# Altium PCB ATRACK_PILOT_V1.PcbDoc
Units mil, origin at the board's own origin, x right, y up, seen from the top; angles counter-clockwise.
Board outline 1732.28 x 1732.28 mil, 2 copper layers (Top Layer, Bottom Layer); 30 components, 25 nets, 112 pads, 31 vias.
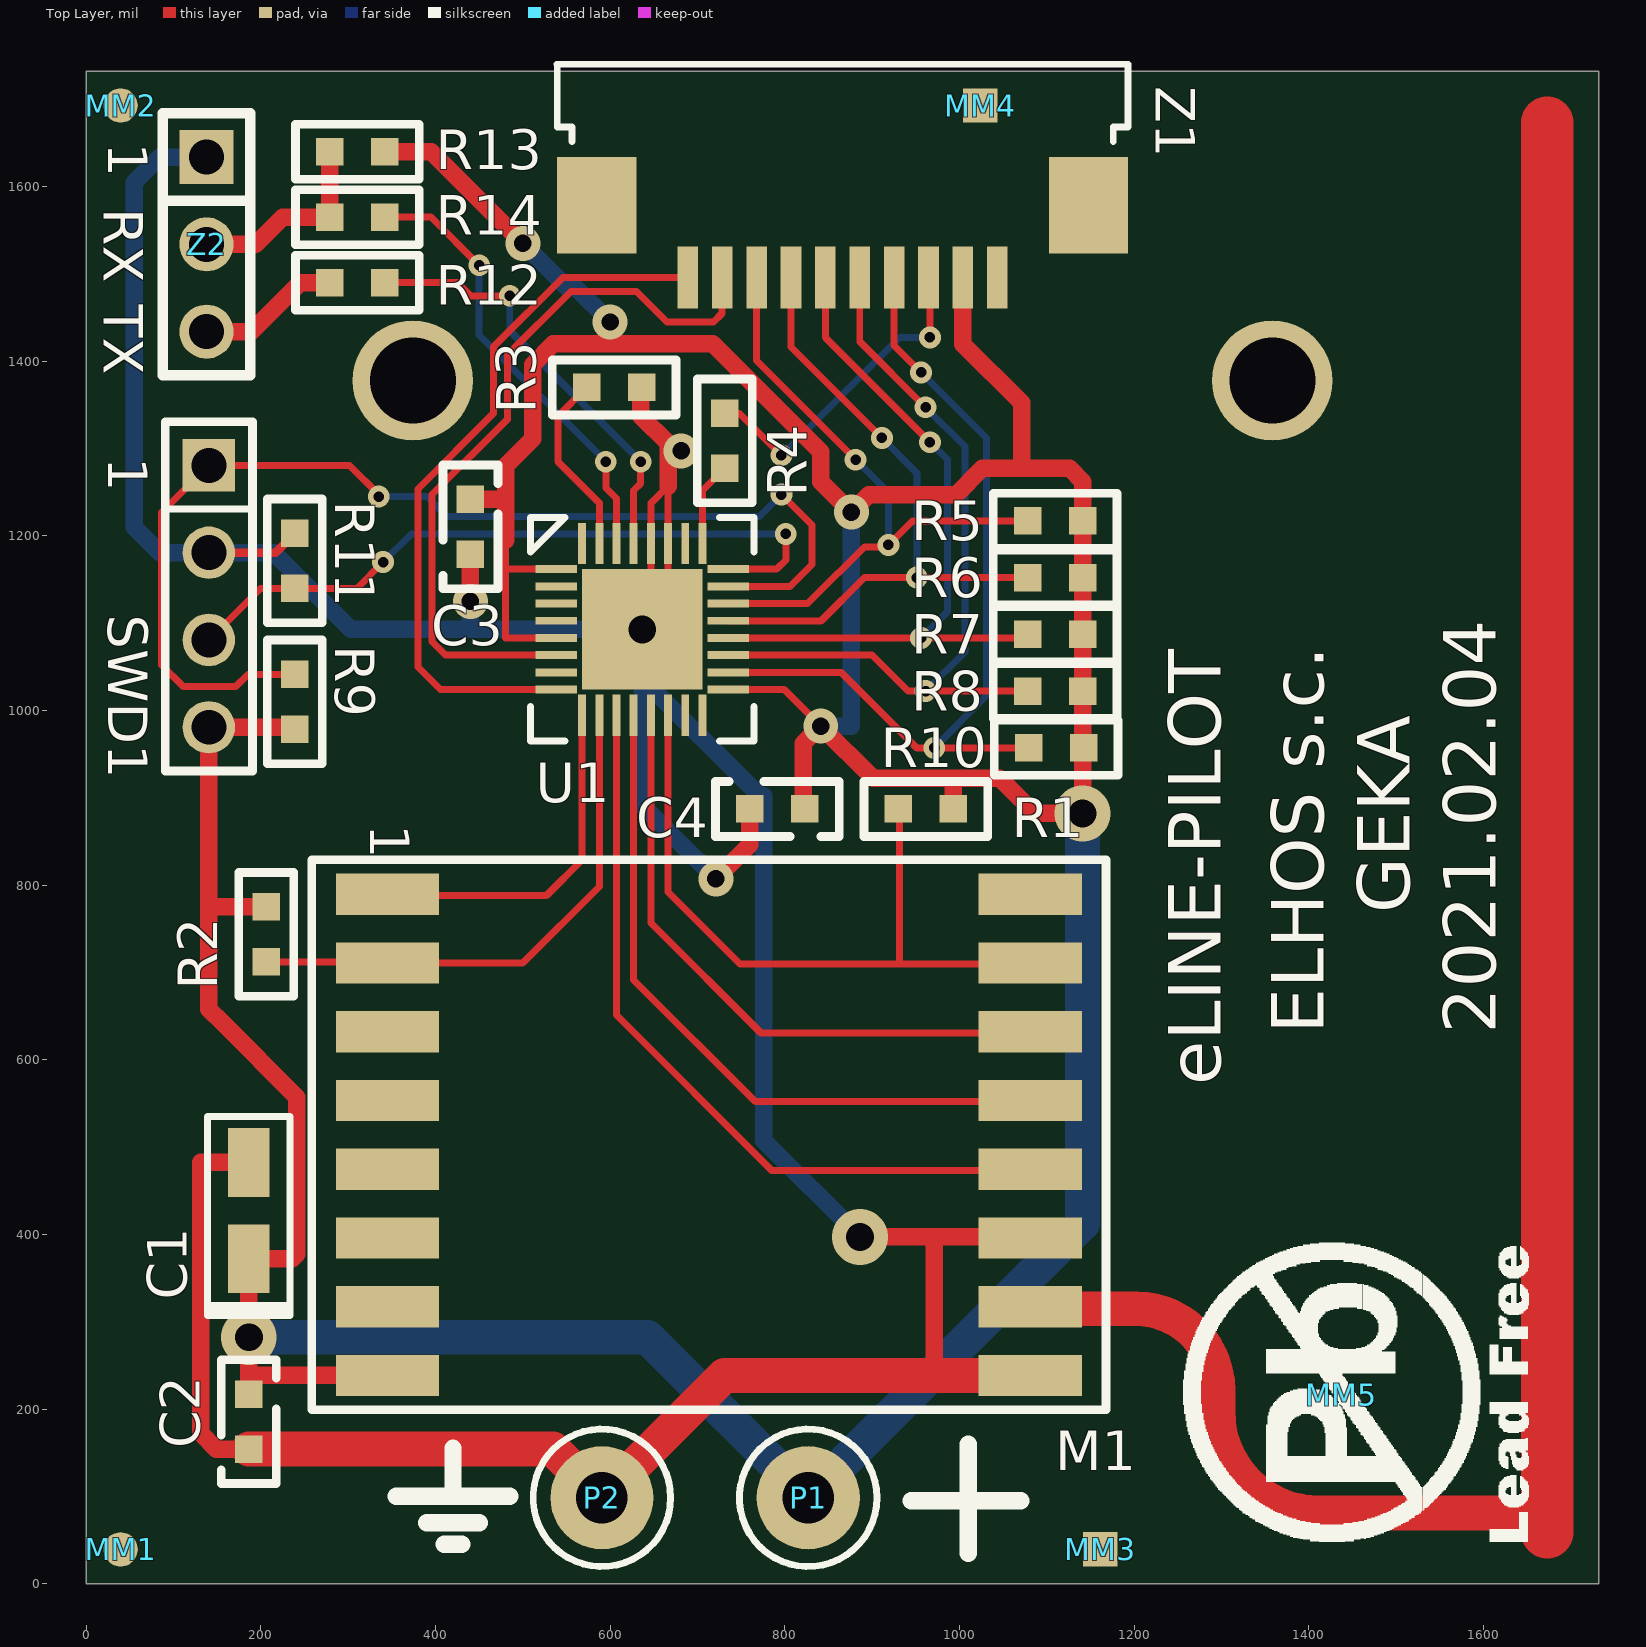
[diagram p0: Top Layer view]
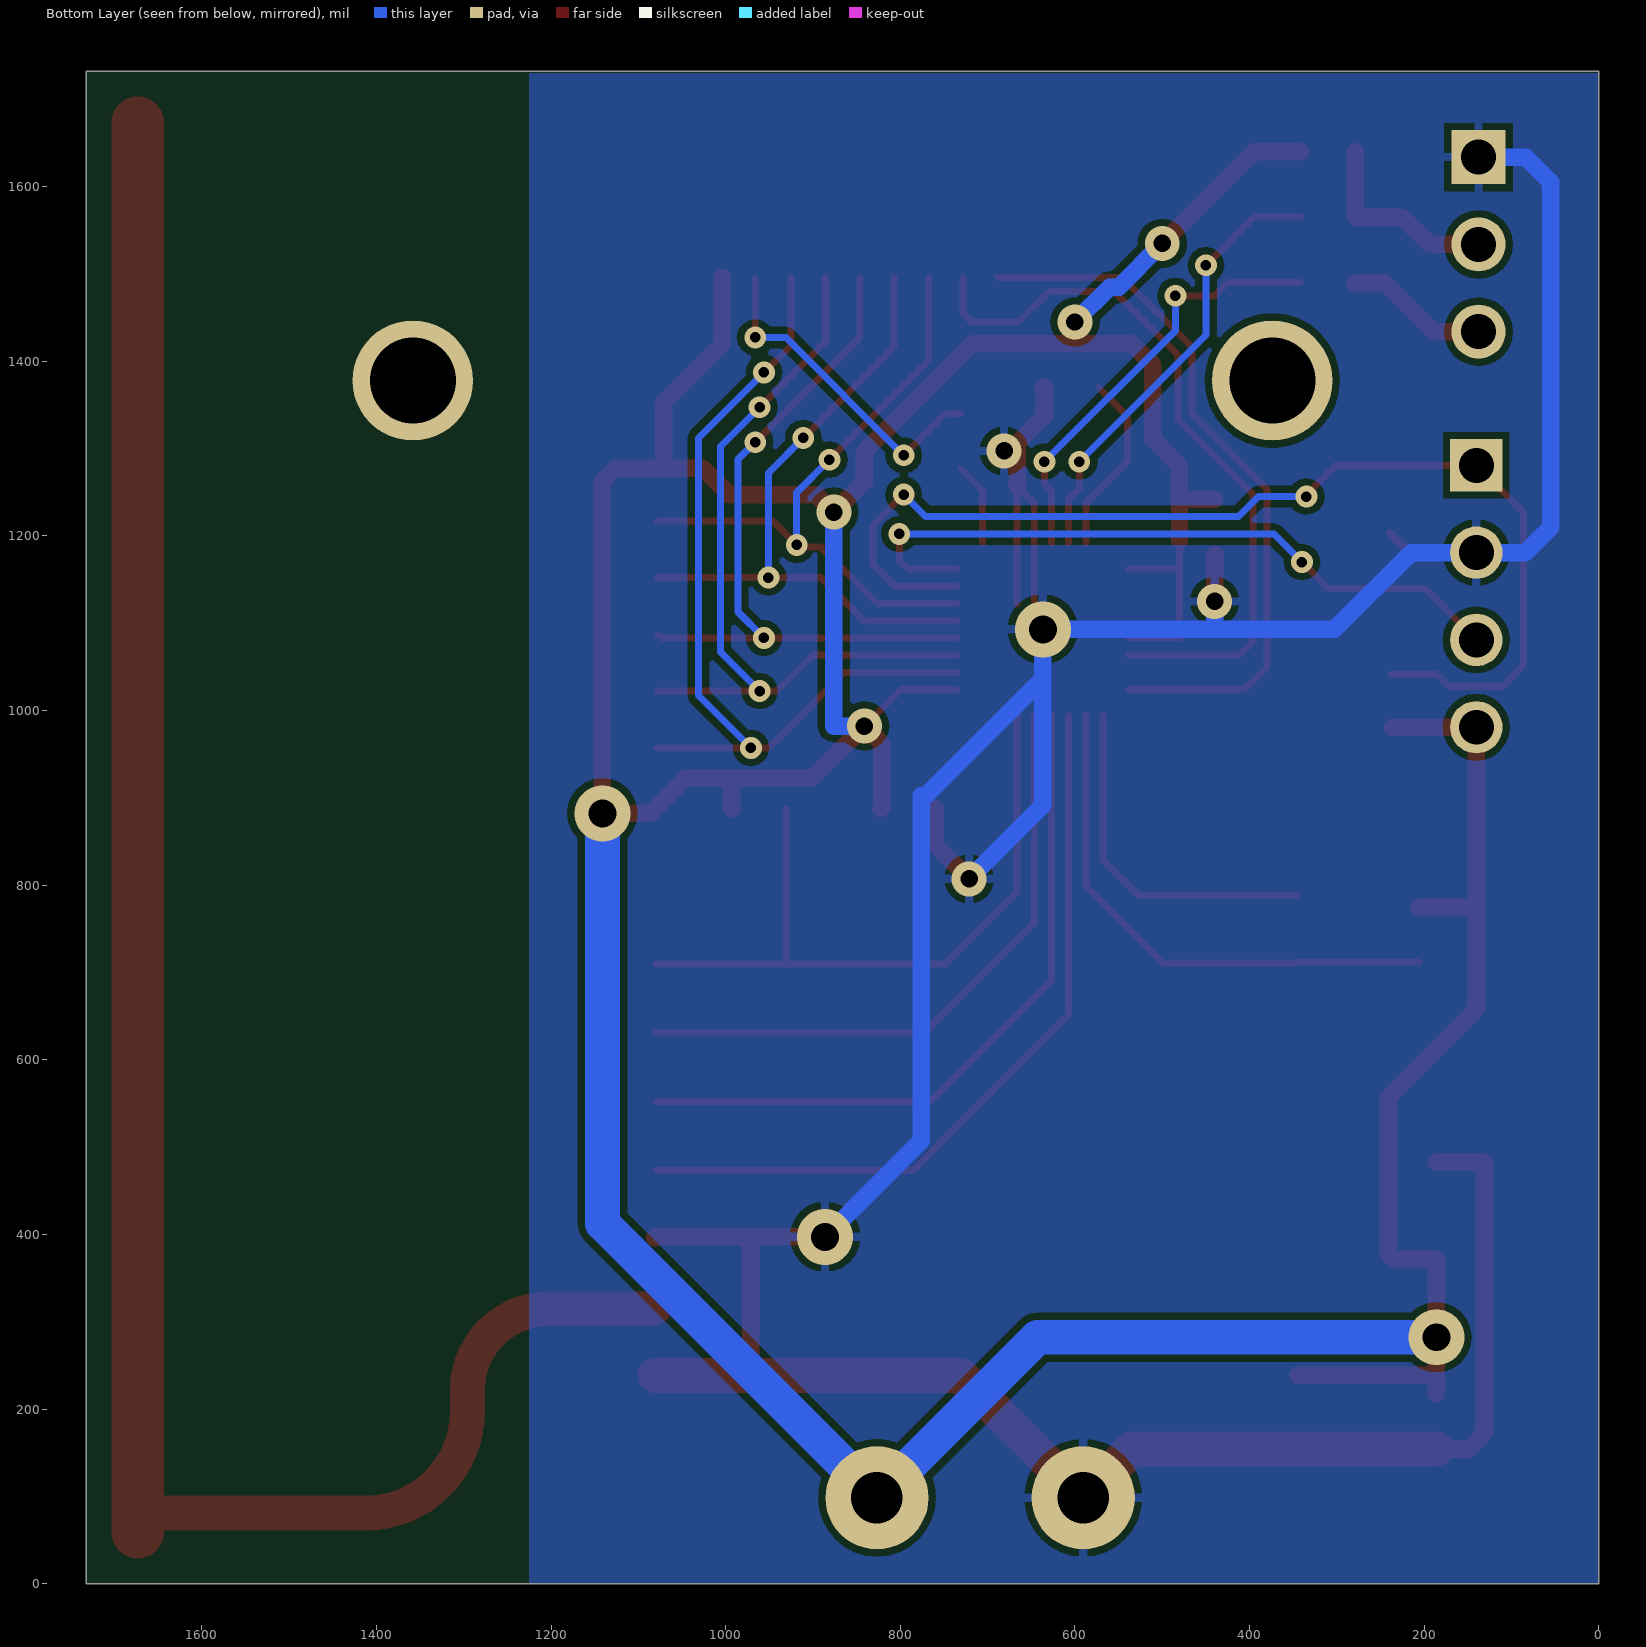
[diagram p1: Bottom Layer view, seen from below]

## Layer stack, top to bottom
Top Layer: signal copper 1.4
Dielectric: dielectric 12.6, FR-4, Dk 4.8
Bottom Layer: signal copper 1.4

## Board outline
0,0 0,1732.28 1732.28,1732.28 1732.28,0

## Design rules (kind name [scope] priority, off if disabled: settings)
Clearance [All] p1: gap=8
ComponentClearance [All] p1 off: gap=10 collisioncheckmode=3 verticalgap=10 showdistances=FALSE
HoleSize [All] p1: absolutevalues=TRUE maxlimit=157.48 minlimit=11.81 maxpercent=80.000 minpercent=20.000
MinimumSolderMaskSliver [All] p1: minsoldermaskwidth=4
PolygonConnect [All] p1: connectstyle=Relief reliefconductorwidth=10 reliefentries=4 polygonreliefangle="90 Angle"
RoutingVias [All] p1: holewidth=19.68 width=40 viastyle="Through Hole" minholewidth=11.81 minwidth=25 maxholewidth=78.74 maxwidth=200
SilkToSilkClearance [All] p1: silktosilkclearance=4
SilkscreenOverComponentPads [All] p1: minsilkscreentomaskgap=4
SolderMaskExpansion [All] p1: expansion=4
Width [All] p1: maxlimit=100 minlimit=8 preferedwidth=10 minimp=50.000000 maximp=50.000000 favimp=50.000000
23 further rules are at their usual default settings.

## Components (designator, comment, footprint, x,y, rotation, side; value= is the part's Value field where it differs from the comment)
C1 "10u/6.3V" CAP_A 186.14,482.52 r270 top
C2 "100n" 0603C 186.14,150.35 r270 top
C3 "100n" 0603C 440,1175 r270 top
C4 "100n" 0603C 756.14,887.28 r180 top
M1 "RFM69W" RFM69W 325.24,199.17 r0 top
MM1 "" REF_CIR 39.37,39.37 r0 top
MM2 "" REF_CIR 39.37,1692.91 r0 top
MM3 "" REF_SQR 1161.42,39.37 r0 top
MM4 "" REF_SQR 1023.62,1692.91 r0 top
MM5 "" PB_FREE_GRAF 1437.01,216.54 r90 top
P1 "PIN" PP_PICO6 826.77,98.43 r0 top
P2 "PIN" PP_PICO6 590.55,98.43 r0 top
R1 "10k" 0603R 926.14,887.28 r180 top
R2 "10k" 0603R 206.14,779.21 r90 top
R3 "10k" 0603R 640,1370 r0 top
R4 "1k" 0603R 731.14,1273.35 r270 top
R5 "10k" 0603R 1145.08,1217.28 r0 top
R6 "10k" 0603R 1145.08,1152.28 r0 top
R7 "10k" 0603R 1145.08,1087.28 r0 top
R8 "10k" 0603R 1145.08,1022.28 r0 top
R9 "10k" 0603R 238.78,974.57 r270 top
R10 "10k" 0603R 1146.14,957.28 r0 top
R11 "10k" 0603R 238.78,1206.85 r90 top
R12 "33R" 0603R 275,1490 r180 top
R13 "10k" 0603R 275,1640 r180 top
R14 "33R" 0603R 275,1565 r180 top
SWD1 "ST-LINK" PIN4 140.35,1280.87 r270 top
U1 "STM32L031xx" UFQFPN32 538.35,1191.42 r270 top
Z1 "Header 10" MX-52271-2079 688.98,1496.06 r0 top locked
Z2 "Header 3" PIN3 137.8,1633.86 r90 top

## Footprints (in the part's own frame and the unit in brackets; to place one, negate y for a bottom-side part, rotate by r counter-clockwise, add the part's x,y. Pads: shape width x height; smd on the part's side, far side on the other; paste and mask are expansions set on the pad)
0603C [mm]
  rect 0.8x0.8 smd: 1(-0.1,0) 2(-1.7,0)
  silkscreen extent -2.7,-0.8 0.9,0.8
0603R [mm]
  rect 0.8x0.8 smd: 1(-0.1,0) 2(-1.7,0)
  silkscreen extent -2.7,-0.8 0.9,0.8
CAP_A [mm]
  rect 2x1.2 smd: 1(0,0) 2(2.8,0)
  silkscreen extent -1.34,-1.2 4.45,1.2
MX-52271-2079 [mm]
  rect 2.3x2.8 smd: 0(-2.65,2.1) 0(11.65,2.1)
  rect 0.6x1.8 smd: 1(0,0) 2(1,0) 3(2,0) 4(3,0) 5(4,0) 6(5,0) 7(6,0) 8(7,0) 9(8,0) 10(9,0)
  silkscreen extent -3.8,3.95 12.8,6.2
PB_FREE_GRAF [mil]
  silkscreen extent -169,-215 174,181
PIN3 [mil]
  rect 62x62 hole 40: 1(0,0)
  round 62 hole 40: 2(-100,0) 3(-200,0)
  silkscreen extent -250,-50 50,50
PIN4 [mil]
  rect 60x60 hole 40: 1(0,0)
  round 60 hole 40: 2(100,0) 3(200,0) 4(300,0)
  silkscreen extent -50,-50 350,50
PP_PICO6 [mm]
  round 3 hole 1.5: 1(0,0)
  silkscreen extent -2,-2 2,2
REF_CIR [mm]
  round 1 smd paste-0.5 mask+0.5: 0(0,0)
REF_SQR [mm]
  rect 1x1 smd paste-0.5 mask+0.5: ""(0,0)
RFM69W [mm]
  rect 3x1.2 smd: 1(0.5,15) 2(0.5,13) 3(0.5,11) 4(0.5,9) 5(0.5,7) 6(0.5,5) 7(0.5,3) 8(0.5,1) 9(19.2,1) 10(19.2,3) 11(19.2,5) 12(19.2,7) 13(19.2,9) 14(19.2,11) 15(19.2,13) 16(19.2,15)
  silkscreen extent -1.7,0 21.4,16
UFQFPN32 [mm]
  rect 0.23x1.2 smd mask+0.152: 1(0.75,0) 2(1.25,0) 3(1.75,0) 4(2.25,0) 5(2.75,0) 6(3.25,0) 7(3.75,0) 8(4.25,0) 17(4.25,5) 18(3.75,5) 19(3.25,5) 20(2.75,5) 21(2.25,5) 22(1.75,5) 23(1.25,5) 24(0.75,5)
  rect 1.2x0.23 smd mask+0.152: 9(5,0.75) 10(5,1.25) 11(5,1.75) 12(5,2.25) 13(5,2.75) 14(5,3.25) 15(5,3.75) 16(5,4.25) 25(0,4.25) 26(0,3.75) 27(0,3.25) 28(0,2.75) 29(0,2.25) 30(0,1.75) 31(0,1.25) 32(0,0.75)
  rect 3.5x3.5 smd mask+0.203: 33(2.5,2.5)
  silkscreen extent -0.75,-0.75 5.75,5.75

## Part data
C1: library part CAP_TANTAL_SMD, "KONDENSATOR ELEKTROLITYCZNY TANTALOWY SMD"
C2 C3 C4: library part CAP, "Capacitor"
M1: library part RFM96W
MM1 MM2 MM3 MM4 MM5: library part MECH
R1 R2 R3 R4 R5 R6 R7 R8 R9 R10 R11 R12 R13 R14: library part RES3
SWD1: library part SW_CON, "Header, 4-Pin"
U1: library part STM32L031xx/UFQFPN32
Z1: "Header, 10-Pin"
Z2: "Header, 3-Pin"

## Free pads (board coordinates)
  round 137.8 hole 98.43: 0(374.02,1377.95) 1(1358.27,1377.95)

## Via types
v1: diameter 25, hole 12, Top Layer to Bottom Layer, tented both sides, 20 vias
v2: diameter 40, hole 20, Top Layer to Bottom Layer, tented both sides, 7 vias
v3: diameter 64, hole 32, Top Layer to Bottom Layer, tented both sides, 3 vias
v4: diameter 64, hole 32, Top Layer to Bottom Layer, 1 vias

## Nets (pads, with @x,y where several pads share a name; then routed paths per layer and width w, separated by ;. In a path a pad name is that pad's centre, name@x,y a point inside that pad or via, vN(x,y) a via of type N, cw(c..) or ccw(c..) an arc to the next point about the centre after c; other vN are vias at no path point)
ANT: M1.10 | length 2343.4
  Top Layer w40: M1.10@1082.68,314.96 1202.48,314.96 cw(c1202.48,221.53) 1295.91,221.53 1295.91,196.85 ccw(c1411.85,196.85) 1411.85,80.9 1667.76,80.9
  Top Layer w60: 1673.23,59.06 1673.23,1673.23
COL1: R5.2 U1.22 Z1.3 | length 751
  Top Layer w8: U1.22 826.14,1122.52 861.14,1157.52 861.38,1157.52 891.14,1187.28 916.14,1187.28 v1(918.64,1189.78) 946.14,1217.28 R5.2 ; Z1.3 767.72,1400.71 v1(881.14,1287.28)
  Bottom Layer w8: v1(881.14,1287.28) 918.64,1249.78 v1(918.64,1189.78)
COL2: R6.2 U1.21 Z1.4 | length 766.9
  Top Layer w8: U1.21 841.69,1102.83 891.14,1152.28 v1(951.14,1152.28) R6.2 ; Z1.4 807.09,1416.34 v1(911.14,1312.28)
  Bottom Layer w8: v1(911.14,1312.28) 951.14,1272.28 v1(951.14,1152.28)
COL3: R7.2 U1.20 Z1.5 | length 827.9
  Top Layer w8: U1.20 v1(956.14,1083.15) 1074.02,1083.15 R7.2 ; Z1.5 846.46,1426.97 v1(966.14,1307.28)
  Bottom Layer w8: v1(956.14,1083.15) 986.14,1113.15 986.14,1287.28 v1(966.14,1307.28)
COL4: R8.2 U1.19 Z1.6 | length 902.3
  Top Layer w8: U1.19 899.96,1063.46 941.14,1022.28 v1(961.14,1022.28) R8.2 ; Z1.6 885.83,1422.6 v1(961.14,1347.28)
  Bottom Layer w8: v1(961.14,1022.28) 1006.14,1067.28 1006.14,1302.28 v1(961.14,1347.28)
COL5: R10.2 U1.18 Z1.7 | length 987.4
  Top Layer w8: U1.18 864.65,1043.78 951.14,957.28 v1(971.14,957.28) R10.2 ; Z1.7 925.2,1418.23 v1(956.14,1387.28)
  Bottom Layer w8: v1(956.14,1387.28) 1031.14,1312.28 1031.14,1017.28 v1(971.14,957.28)
GND: C1.1 C2.1 C3.1 C4.1 M1.9 M1.11 P2.1 R3.1 R11.1 SWD1.2 U1.27 U1.28 U1.33 Z2.1 | length 4675.6
  Top Layer w8: U1.33@646.61,1102.83 U1.28 646.61,1237.44 666.3,1257.13 U1.27 U1.33@666.3,1122.52
  Top Layer w10: SWD1.2 216.73,1180.87 R11.1
  Top Layer w20: C2.1 149.13,154.29 131.14,172.28 131.14,482.28 131.38,482.52 C1.1 ; v2(440,1125) C3.1 ; R3.1 635,1368.94 635,1337.28 v2@666.3,1305.98 ; 666.3,1257.13 v2@666.3,1305.98 ; v2(681.14,1297.28) 675,1297.28 v2@666.3,1305.98 ; v2(721.14,807.28) 760.08,846.22 C4.1 ; v3(886.14,397.28) 971.14,397.28 ; 971.14,238.54 971.14,397.28 ; M1.11 1079.88,397.28 971.14,397.28
  Top Layer w40: C2.1 534.68,154.29 P2.1 730.67,238.54 971.14,238.54 M1.9
  Bottom Layer w20: Z2.1 83.86,1633.86 55,1605 55,1210 84.13,1180.87 SWD1.2 215,1180.87 302.87,1092.99 440,1092.99 ; v2(440,1125) 440,1092.99 ; v2(721.14,807.28) 636.77,891.65 636.77,1036.65 ; v3(886.14,397.28) 776.14,507.28 776.14,902.28 771.14,902.28 636.77,1036.65 ; 440,1092.99 v4(636.77,1092.99) 636.77,1036.65
INT_R: M1.2 R2.2 U1.10 | length 612.3
  Top Layer w8: R2.2 M1.2@343.62,712.28 ; M1.2 499.84,710.98 587.56,798.7 U1.10
LED1: R4.1 U1.25 | length 96.4
  Top Layer w8: U1.25 705.67,1251.81 R4.1
NetR3_2: R3.2 U1.31 | length 212
  Top Layer w8: R3.2 540,1336.93 540,1285 587.56,1237.44 U1.31
NetR4_2: R4.2 Z1.8 | length 378
  Top Layer w8: R4.2 748.15,1340.28 v1(796.14,1292.28) ; v1(966.14,1427.28) Z1.8@966.14,1494.49
  Bottom Layer w8: v1(796.14,1292.28) 931.14,1427.28 v1(966.14,1427.28)
NetR12_1: R12.1 Z2.3 | length 164.4
  Top Layer w20: Z2.3 188.86,1433.86 245,1490 R12.1
NetR13_1: R13.1 R14.1 Z2.2 | length 229
  Top Layer w20: Z2.2 193.86,1533.86 225,1565 R14.1 R13.1
RESET_R: M1.1 U1.9 | length 405.3
  Top Layer w8: M1.1@344.92,788.46 527.32,788.46 567.87,829.02 U1.9
ROW1: U1.6 Z1.2 | length 848.7
  Top Layer w8: U1.6 411.54,1063.46 396,1079 396,1247.23 482.14,1333.37 482.14,1407.14 555,1480 630,1480 665,1445 718.35,1445 728.35,1455 Z1.2
ROW2: U1.8 Z1.1 | length 826.8
  Top Layer w8: U1.8 405.91,1024.09 380,1050 380,1253.86 466.14,1340 466.14,1416.14 546.06,1496.06 Z1.1
RXD: R14.2 U1.30 | length 514.6
  Top Layer w8: R14.2 395,1565 v1(450,1510) ; v1(595,1285) 595,1255 607.24,1242.76 U1.30
  Bottom Layer w8: v1(450,1510) 450,1430 v1(595,1285)
SPI_CS: M1.15 R1.1 U1.14 | length 825.2
  Top Layer w8: U1.14 666.3,792.13 748.7,709.72 M1.15@1079.88,709.72 ; 931.14,712.28 R1.1@931.14,887.28
SPI_MISO: M1.13 U1.12 | length 813.7
  Top Layer w8: U1.12 626.93,691.5 766.18,552.24 M1.13@1079.88,552.24
SPI_MOSI: M1.14 U1.13 | length 723.1
  Top Layer w8: U1.13 646.61,756.81 772.44,630.98 M1.14@1079.88,630.98
SPI_SCK: M1.12 U1.11 | length 889.6
  Top Layer w8: U1.11 607.24,651.18 784.92,473.5 M1.12@1079.88,473.5
SWCLK: R11.2 SWD1.3 U1.24 | length 811.3
  Top Layer w8: SWD1.3 199.41,1139.92 R11.2 309.92,1139.92 v1(340,1170) ; U1.24 790.75,1161.89 801.14,1172.28 v1(801.14,1202.28)
  Bottom Layer w8: v1(340,1170) 372.28,1202.28 v1(801.14,1202.28)
SWDIO: R9.2 SWD1.1 U1.23 | length 1310.2
  Top Layer w8: R9.2 185.35,1041.5 171.14,1027.28 111.14,1027.28 86.14,1052.28 86.14,1226.65 SWD1.1 301.42,1280.87 v1@335,1247.28 ; U1.23 806.06,1142.2 831.14,1167.28 831.14,1212.28 v1(796.14,1247.28)
  Bottom Layer w8: v1(335,1245) 390,1245 412.72,1222.28 771.14,1222.28 v1(796.14,1247.28)
TXD: R12.2 U1.29 | length 498.3
  Top Layer w8: R12.2 425,1490 440,1475 v1(485,1475) ; U1.29 626.93,1251.93 635,1260 v1(635,1285)
  Bottom Layer w8: v1(485,1475) 485,1435 v1(635,1285)
VC3: C1.2 C2.2 C3.2 C4.2 M1.8 P1.1 R1.2 R2.1 R5.1 R6.1 R7.1 R8.1 R9.1 R10.1 R13.2 SWD1.4 U1.1 U1.5 U1.17 Z1.9 | length 5935.3
  Top Layer w8: 480.28,1195 480.28,1083.15 U1.5 ; 480.67,1161.89 U1.1 ; U1.17 799.33,1024.09 v2(841.14,982.28) ; R10.1@1141.14,958.35 R10.1
  Top Layer w20: 140.35,775.28 R2.1 ; C2.2 186.14,242.28 ; R9.1@236.42,980.87 SWD1.4 140.35,658.07 156.14,642.28 241.14,557.28 241.14,377.28 236.14,372.28 C1.2 v3(186.14,282.28) 186.14,242.28 ; R13.2 395,1640 v2(500,1535) ; M1.8 189.88,238.54 186.14,242.28 ; C3.2 480.28,1241.93 ; 480.28,1195 480.28,1241.93 ; v2(600,1445) 600,1420 ; C4.2 821.14,889.21 821.14,962.28 v2(841.14,982.28) 901.14,922.28 991.14,922.28 ; R1.2 993.07,920.35 991.14,922.28 ; Z1.9 1003.94,1419.49 1071.14,1352.28 1071.14,1277.28 ; 480.28,1241.93 480.28,1280.28 511.14,1311.14 511.14,1396.14 535,1420 600,1420 ; 600,1420 717.31,1420 841.14,1296.17 841.14,1262.28 v2(876.14,1227.28) 896.14,1247.28 996.14,1247.28 1026.14,1277.28 1071.14,1277.28 ; 991.14,922.28 1046.14,922.28 1086.14,882.28 v3(1141.14,882.28) 1141.14,958.35 R8.1 R7.1 R6.1 R5.1 1141.14,1262.28 1126.14,1277.28 1071.14,1277.28
  Bottom Layer w20: v2(500,1535) 550,1485 560,1485 v2(600,1445) ; v2(841.14,982.28) 876.14,982.28 v2(876.14,1227.28)
  Bottom Layer w40: v3(186.14,282.28) 642.91,282.28 P1.1 1141.14,412.8 v3(1141.14,882.28)
pads on no net: M1.3 M1.4 M1.5 M1.6 M1.7 M1.16 MM1.0 MM2.0 MM3. MM4. U1.2 U1.3 U1.4 U1.7 U1.15 U1.16 U1.26 U1.32 Z1.0 Z1.10

## Polygon pours and split planes (outlines as drawn)
GND on Bottom Layer "GND_Poly" (solid, remove dead copper, pour order 2): 1225,1730 1225,0 0,0 0,1730

## Silkscreen, mask and mechanical layers (free items; w line width, h text height)
Top Overlay:
  lines w20: 355,100 420,100 ; 390,70 450,70 ; 410,45 430,45 ; 420,155 420,100 ; 485,100 420,100 ; 945,95 1070,95 ; 1010,35 1010,160
  text "1" at 25,1650 h45 r270
  text "RX" at 20,1575 h45 r270
  text "TX" at 20,1465 h45 r270
  text "1" at 25,1290 h45 r270
  text "GEKA" at 1515.75,767.72 h60 r90
  text "ELHOS s.c." at 1417.32,629.92 h60 r90
  text "2021.02.04" at 1614.17,629.92 h60 r90
  text "eLINE-PILOT" at 1299.21,570.87 h60 r90
Mechanical 1:
  the board outline again, w8

## Text inside footprints (layer, text, board x,y; h text height)
M1: Top Overlay "1" at 325,870 h45 r270